# Allegro board 17_A01_OSCILLATOR.brd
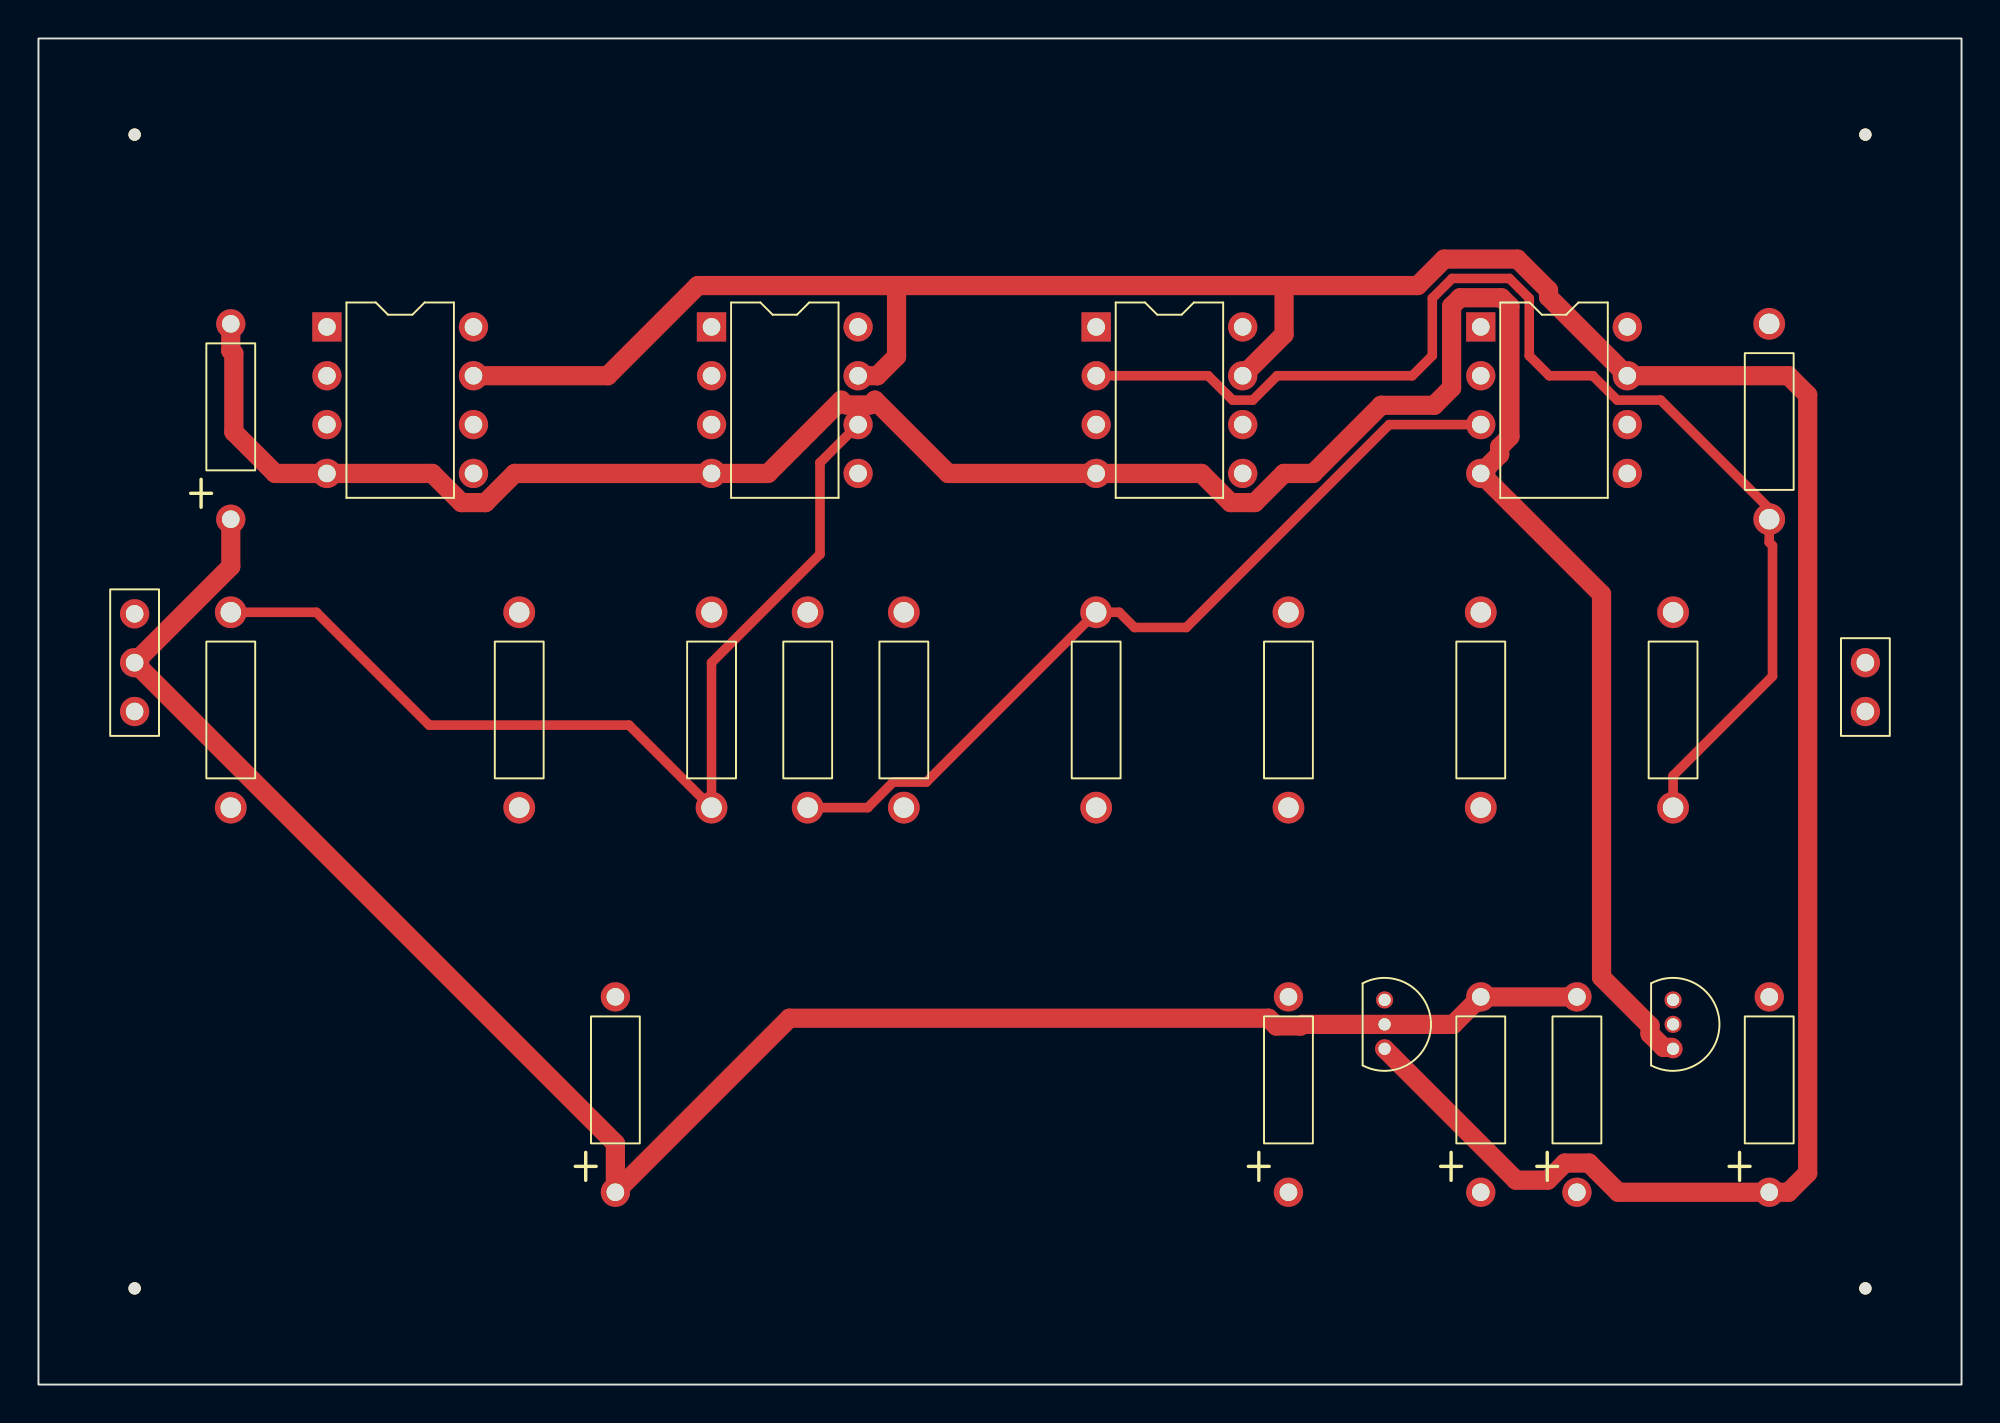
[diagram p0: board, top side]
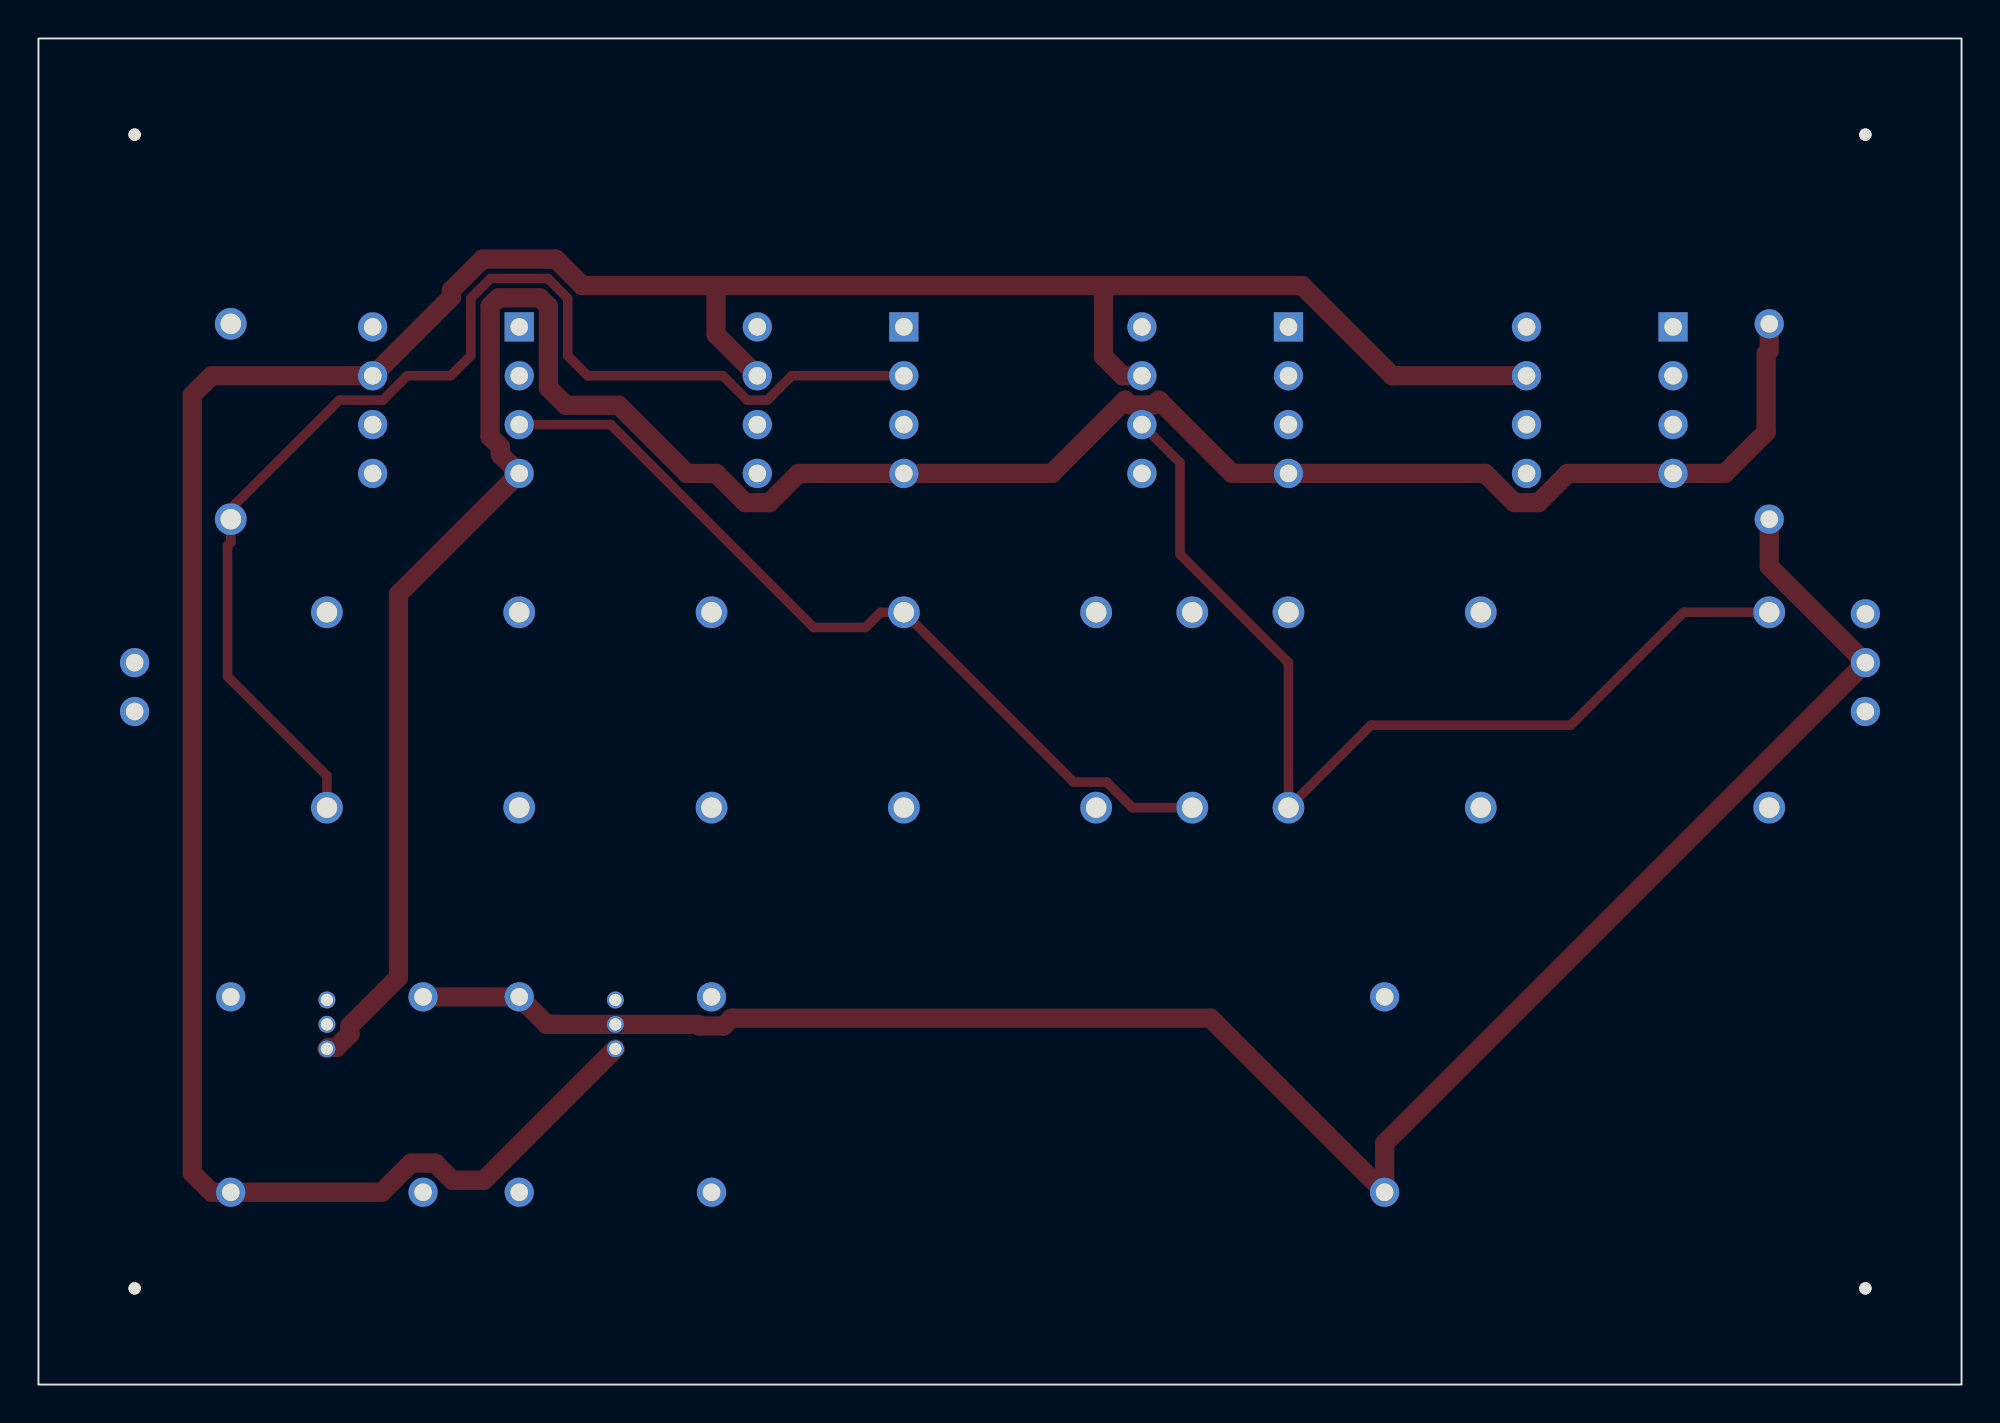
[diagram p1: board, bottom side, seen from below]

Outline 100 x 70 mm; copper layers: TOP, BOTTOM. Coordinates in mm from the lower left corner of the outline.
Outline path: rectangle 0,0 100,70

## Design rules (mm)
nets with their own width: min track width 1; nets +VCC -VCC GND

## Placement (name value [footprint] x y rotation side)
C1  0.001uF  [CAP400]  65 10 0 top
C2  270pF  [CAP400]  75 10 0 top
C3  0.1uF  [CAP400]  80 10 0 top
C4  0.1uF  [CAP400]  90 10 0 top
C5  0.1uF  [CAP400]  30 10 0 top
C6  0.1uF  [CAP400]  10 45 0 top
J1  CON2  [JUMPER2]  95 35 90 top
J2  CON3  [JUMPER3]  5 35 90 top
NOREF  -  [unnamed]  5 65 0 top
NOREF#2  -  [unnamed]  95 65 0 top
NOREF#3  -  [unnamed]  95 5 0 top
NOREF#4  -  [unnamed]  5 5 0 top
R1  100K  [RES400]  10 30 0 top
R2  10K  [RES400]  25 30 0 top
R3  10K  [RES400]  35 30 0 top
R4  10K  [RES400]  40 30 0 top
R5  62K  [RES400]  45 30 0 top
R6  10K  [RES400]  55 30 0 top
R7  10K  [RES400]  65 30 0 top
R8  10K  [RES400]  75 30 0 top
R9  10K  [RES400]  85 30 0 top
R10  10K  [RES400]  90 45 0 top
U1  LF351  [DIP8_3]  15 55 0 top
U2  LF351  [DIP8_3]  35 55 0 top
U3  LF351  [DIP8_3]  55 55 0 top
U4  LF351  [DIP8_3]  75 55 0 top
U5  LM7812/TO  [TO92]  70 20 0 top
U6  LM7812/TO  [TO92]  85 20 0 top

## Library data of the parts
C1-C6 = CAP NP: Tolerance: ***; User Part Number: ***
J1 = CON2: User Part Number: ***
J2 = CON3: User Part Number: ***
R1-R10 = R: Tolerance: ***; User Part Number: ***
U1-U4 = LF351_0: Tolerance: ***; User Part Number: ***
U5 = LM7812/TO_4
U6 = LM7812/TO_5

## Footprints (pads in the part's own frame, mm; a bottom-side part is the same pattern mirrored in y, then rotated)
CAP400
  round 1.524 hole 0.914: 1(0,0) 2(0,10.16)
DIP8_3
  rect 1.524x1.524 hole 0.914: 1(0,0)
  round 1.524 hole 0.914: 2(0,-2.54) 3(0,-5.08) 4(0,-7.62) 5(7.62,-7.62) 6(7.62,-5.08) 7(7.62,-2.54) 8(7.62,0)
JUMPER2
  round 1.524 hole 0.914: 1(0,0) 2(2.54,0)
JUMPER3
  round 1.524 hole 0.914: 1(0,0) 2(2.54,0) 3(5.08,0)
RES400
  round 1.651 hole 1.067: 1(0,0) 2(0,10.16)
TO92
  round 0.889 hole 0.635: 1(0,0) 2(0,-1.27) 3(0,-2.54)
unnamed
  round 0.635 hole 3.175 unplated: (0,0)

## Nets
+VCC: C4.1 U1.7(V+) U2.7(V+) U3.7(V+) U4.7(V+) U5.3(VOUT)
-VCC: C6.2 U1.4(V-) U2.4(V-) U3.4(V-) U4.4(V-) U6.3(VOUT)
GND: C2.2 C3.2 C4.2 C5.1 C6.1 J1.2 J2.2 R7.2 R8.2 R10.2 U4.2(-IN) U5.2(GND) U6.1(GND)
OUT: J1.1 R4.2 U4.6(OUT)
SIG: C1.2 R1.2 R3.1 U2.6(OUT) U3.3(+IN)
N01134: C3.1 J2.1 U5.1(VIN)
N01157: C5.2 J2.3 U6.2(VIN)
N01382: C2.1 R2.1 U1.3(+IN)
N01428: R7.1 U1.2(-IN)
N01453: R5.1 U1.6(OUT)
N01562: R2.2
N01639: C1.1 R1.1 R5.2 U2.3(+IN)
N01643: R8.1 U2.2(-IN)
N01831: R9.1 R10.1 U3.2(-IN)
N02086: R3.2 R9.2
N02238: R6.1 U3.6(OUT)
N02341: R4.1 R6.2 U4.3(+IN)

Pads without a net: U1 1 5 8; U2 1 5 8; U3 1 5 8; U4 1 5 8

## Routing (per net, layer and track width the routed paths; a pad name or vN(x,y) marks a point on that pad's centre or on a via; arc(x,y) is an arc through that point)
+VCC: length 153.5
  TOP w1: 64.77,57.15 64.77,54.61 U3.7 ; 64.77,57.15 44.45,57.15 ; 64.77,57.15 71.72,57.15 73.09,58.52 76.91,58.52 78.52,56.91 78.52,56.56 U4.7 91,52.46 92,51.46 92,11 91,10 C4.1 82.14,10 80.63,11.52 79.37,11.52 78.48,10.63 76.83,10.63 U5.3 ; 44.45,57.15 44.62,56.98 44.62,53.46 43.62,52.46 U2.7 ; 44.45,57.15 34.29,57.15 29.6,52.46 U1.7
-VCC: length 128.9
  TOP w1: U6.3 84.93,17.53 84.5,17.53 83.8,18.23 83.8,18.66 81.28,21.18 81.28,41.1 U4.4 75.98,48.36 75.98,48.76 76.52,49.29 76.52,56.07 76.07,56.52 73.93,56.52 73.48,56.07 73.48,51.83 72.58,50.92 69.82,50.92 66.28,47.38 64.76,47.38 63.25,45.86 61.99,45.86 60.48,47.38 U3.4 47.3,47.38 43.49,51.19 43.25,50.94 41.99,50.94 41.75,51.19 37.94,47.38 U2.4 24.76,47.38 23.25,45.86 21.99,45.86 20.48,47.38 U1.4 12.31,47.38 10.16,49.53 10.16,53.61 10,53.77 C6.2
GND: length 102
  TOP w1: C3.2 C2.2 73.57,18.73 U5.2 65.71,18.73 65.63,18.64 64.37,18.64 63.97,19.05 39.05,19.05 C5.1 30,12.54 J2.2 10,42.54 C6.1
SIG: length 52.3
  TOP w0.5: U2.6 40.64,47.94 40.64,43.18 35,37.54 R3.1 30.71,34.29 20.32,34.29 14.45,40.16 R1.2
N01382: length 0.1
  TOP w0.5: C2.1 75,10.09
N01831: length 64.4
  TOP w0.5: U3.2 60.83,52.46 62.1,51.19 63.14,51.19 64.41,52.46 71.44,52.46 72.48,53.5 72.48,56.49 73.51,57.52 76.49,57.52 77.52,56.49 77.52,53.5 78.56,52.46 80.83,52.46 82.1,51.19 84.36,51.19 90,45.55 R10.1 90,43.8 90.17,43.63 90.17,36.83 85,31.66 R9.1
N02341: length 43.9
  TOP w0.5: R4.1 43.12,30 44.45,31.33 46.17,31.33 R6.2 56.2,40.16 56.99,39.37 59.69,39.37 70.24,49.92 U4.3
